# EAGLE board untitled (EAGLE 9.6.2)
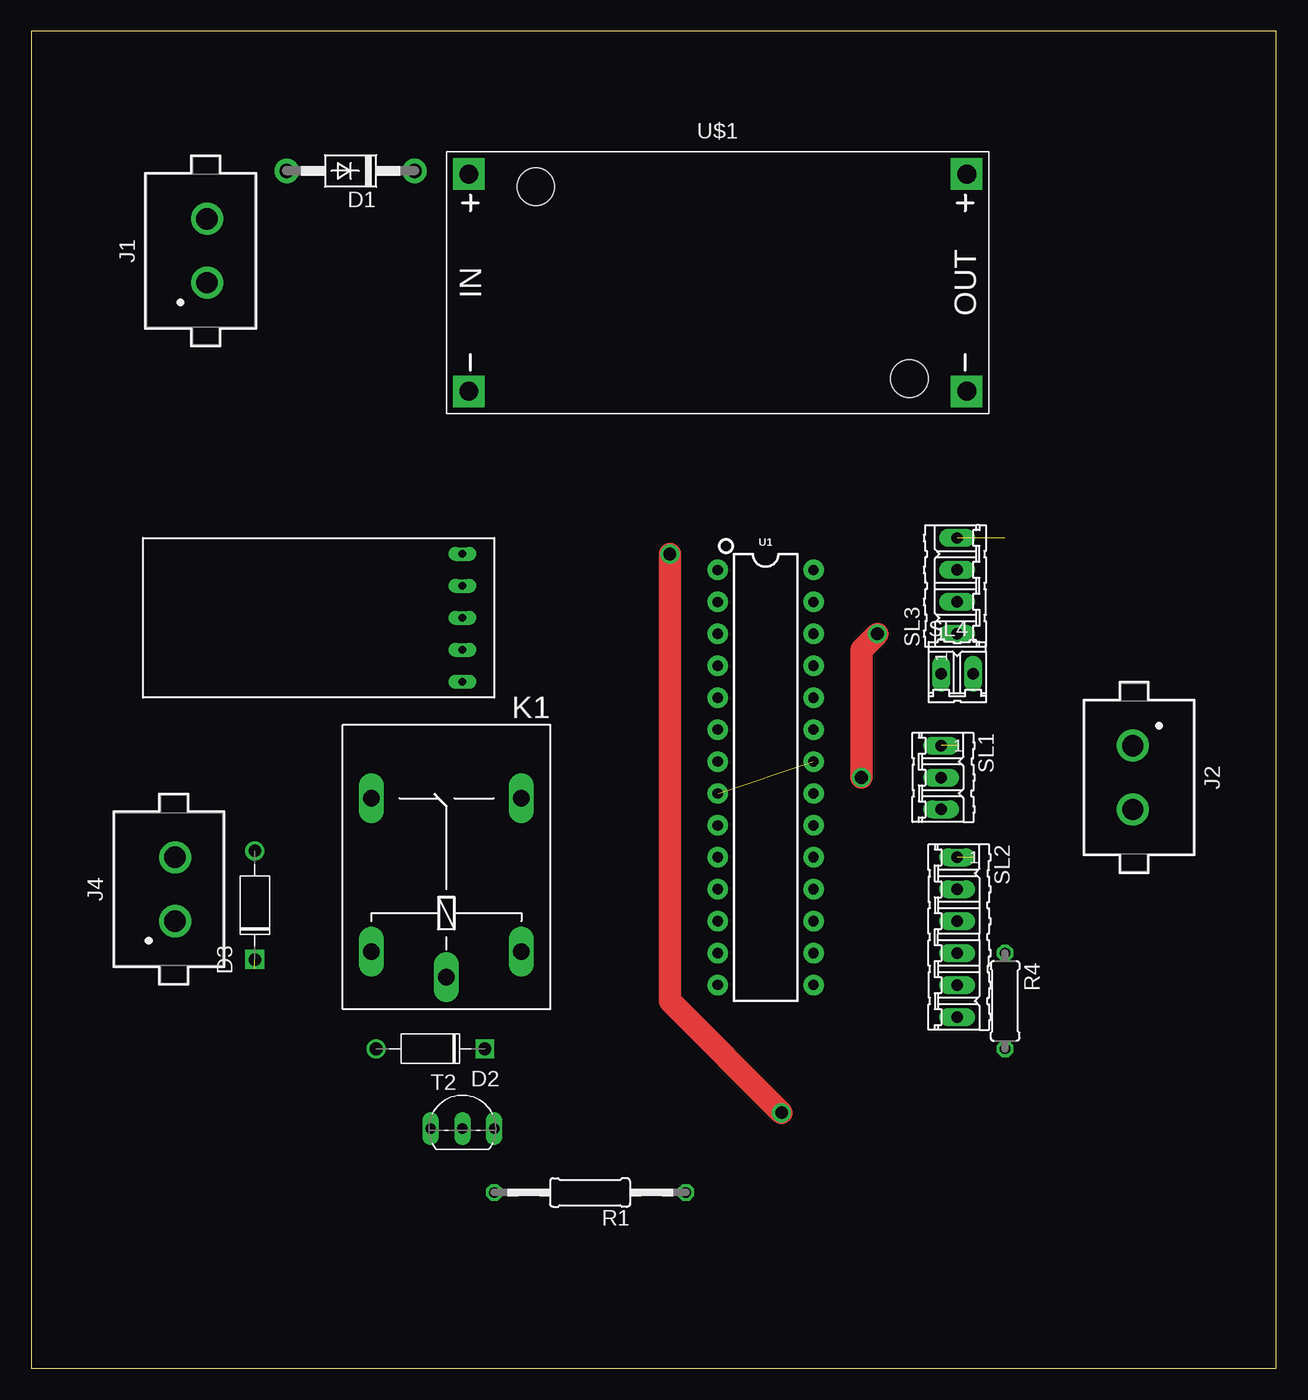
[diagram p0: board, top side]
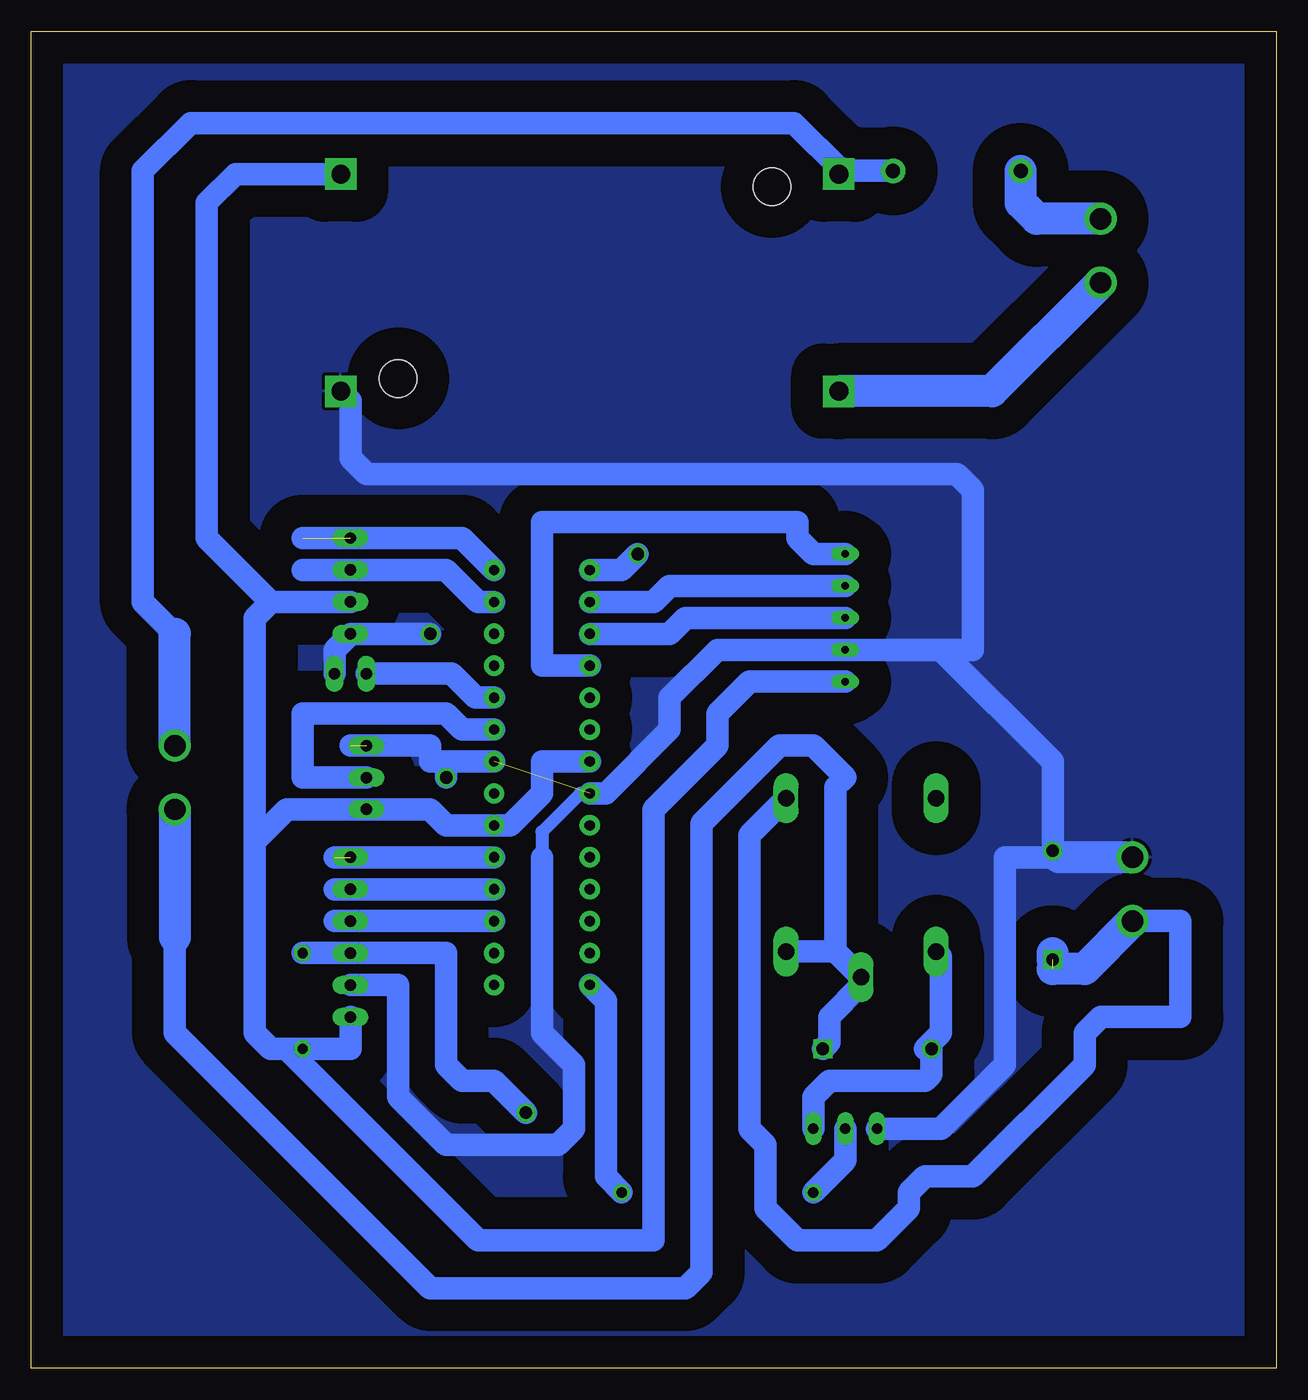
[diagram p1: board, bottom side, seen from below]

Size 99.04 x 106.35 mm. Coordinates in mm from the lower left corner, seen from the top.
Outline: 0,0 99.04,0 99.04,106.35 0,106.35 0,0
Copper layers (1*16): Top 0.035mm / dielectric 1.5mm / Bottom 0.035mm
Design rules "default *": minimum track width 6mil, minimum drill 0.35mm, track to track 30mil, track to pad 30mil, pad to pad 30mil, via to via 30mil, smd to smd 6mil, copper to edge 40mil, drill to drill 6mil, minimum pad ring 10mil, minimum via ring 8mil, stop-mask expansion 4mil, vias tented up to drill 0mil, thermal gap 10mil

## Footprints (pad centres in the part's own frame; a part is rotated, then mirrored left to right if it is on the bottom)
DO41-10 = drill 1.118 pad 1.93: A 5.08,0; C -5.08,0
DO-41 = drill 1: A 4.325,0 | drill 1 square: C -4.325,0
691305530002 = drill 1.7: 1 -2.54,0; 2 2.54,0
G5LE = drill 1.321 long: 1 -7.493,-5.969; 2 -7.493,5.969; O 4.699,5.969; P -9.525,0; S 4.699,-5.969
0207/15 = drill 0.813 octagon: 1 -7.62,0; 2 7.62,0
0207/7 = drill 0.813 octagon: 1 -3.81,0; 2 3.81,0
03P = drill 0.914 long: 1 -2.54,0; 2 0,0; 3 2.54,0
06P = drill 0.914 long: 1 -6.35,0; 2 -3.81,0; 3 -1.27,0; 4 1.27,0; 5 3.81,0; 6 6.35,0
04P = drill 0.914 long: 1 -3.81,0; 2 -1.27,0; 3 1.27,0; 4 3.81,0
02P = drill 0.914 long: 1 -1.27,0; 2 1.27,0
TO92-EBC-OVAL = drill 0.813 long: B 0,-1.27; C 2.54,-1.27; E -2.54,-1.27
DIP28 = drill 0.813 pad 1.626: 1 -16.51,-3.81; 2 -13.97,-3.81; 3 -11.43,-3.81; 4 -8.89,-3.81; 5 -6.35,-3.81; 6 -3.81,-3.81; 7 -1.27,-3.81; 8 1.27,-3.81; 9 3.81,-3.81; 10 6.35,-3.81; 11 8.89,-3.81; 12 11.43,-3.81; 13 13.97,-3.81; 14 16.51,-3.81; 15 16.51,3.81; 16 13.97,3.81; 17 11.43,3.81; 18 8.89,3.81; 19 6.35,3.81; 20 3.81,3.81; 21 1.27,3.81; 22 -1.27,3.81; 23 -3.81,3.81; 24 -6.35,3.81; 25 -8.89,3.81; 26 -11.43,3.81; 27 -13.97,3.81; 28 -16.51,3.81
DC-DC-STEP-DOWN-LM2596 = drill 1.5 pad 2.5 square: IN+ -19.812,8.636; IN- -19.812,-8.636; OUT+ 19.812,8.636; OUT- 19.812,-8.636 | hole 3: -14.478,7.62; 15.24,-7.62
HC12 = drill 0.6 long: P$1 5.08,5.08; P$2 5.08,2.54; P$3 5.08,0; P$4 5.08,-2.54; P$5 5.08,-5.08

## Placement (x,y rotation side)
D1  1N4004  [DO41-10]  25.4,95.25 180 top
D2  1N4007  [DO-41]  31.75,25.4 180 top
D3  1N4007  [DO-41]  17.78,36.83 90 top
J1  691305530002  [691305530002]  13.97,88.9 90 top
J2  [691305530002]  87.63,46.99 270 top
J4  [691305530002]  11.43,38.1 90 top
K1  G5L  [G5LE]  33.02,40.64 90 top
R1  [0207/15]  44.45,13.97 180 top
R4  [0207/7]  77.47,29.21 270 top
SL1  [03P]  72.39,46.99 270 top
SL2  [06P]  73.66,34.29 270 top
SL3  [04P]  73.66,62.23 90 top
SL4  [02P]  73.66,55.25 0 top
T2  2N2222  [TO92-EBC-OVAL]  34.29,20.32 0 top
U1  328P  [DIP28]  58.42,46.99 270 top
U$1  DC-DC-STEP-DOWN-LM2596  [DC-DC-STEP-DOWN-LM2596]  54.61,86.36 0 top
U$3  HC12  [HC12]  29.21,59.69 0 top

## Library data of the parts
D1 R1 R4 T2 = adafruit
D2 D3 = Diodes; CREATED_BY: PCBLayout.com; DIGIKEY_PART_NUMBER: 1N4007MSCT-ND; MANUFACTURER: Micro Commercial Co; MPN: 1N4007; PACKAGE: DO-41
J1 J2 J4 = Wurth_Connectors_WR-TBL Pluggable Connector; DATASHEET-URL: https://www.we-online.com/catalog/datasheet/691305530002.pdf; IR-UL: 16A; MOUNT: THT; PART-NUMBER: 691305530002; PINS: 2; PITCH: 5.08mm; TYPE: Vertical; WORKING-VOLTAGE-UL: 300V (AC)
K1 = relay; OC_FARNELL: unknown; OC_NEWARK: unknown
SL1-SL4 = con-amp-quick; OC_FARNELL: unknown; OC_NEWARK: unknown
U1 = SparkFun-IC-Microcontroller; PROD_ID: IC-09136
U$1 = diy-modules
U$3 = techart

## Nets
GND: D3.A J4.2 SL1.1 SL2.5 SL3.1 SL4.2 T2.E U1.8 U1.22 U$1.OUT- U$3.P$4
N$1: D1.A J1.2
N$2: J1.1 U$1.IN-
N$3: U1.2 U$3.P$2
N$4: SL2.1 U1.19
N$5: SL2.2 U1.18
N$6: SL2.3 U1.17
N$7: U1.3 U$3.P$3
N$8: U1.4 U$3.P$1
N$9: R1.2 T2.B
N$10: D2.A K1.2 T2.C
N$11: D3.C J4.1 K1.S
N$12: D2.C J2.2 K1.1 K1.P
N$13: SL1.2 U1.23
N$14: R4.1 SL2.4 U1.1
N$15: SL4.1 U1.24
RL: R1.1 U1.14
SCL: SL3.4 U1.28
SDA: SL3.3 U1.27
VCC: R4.2 SL1.3 SL2.6 SL3.2 U1.7 U1.20 U$1.OUT+ U$3.P$5
VIN: D1.C J2.1 U$1.IN+

## Tracks (layer width: path | path; a pad name or v marks a point on that pad's centre or on a via)
GND  (via drill 1)  (2 unrouted)
  Top 1.778: v67.31,58.42 66.04,57.15 v66.04,46.99
  Bottom 1.016: U1.8 55.37,45.72 58.42,42.67 58.42,40.64
  Bottom 1.778: T2.E 26.67,19.05 21.59,24.13 21.59,40.64 17.27,40.64 D3.A 17.78,48.26 26.67,57.15 | U1.22 66.04,48.26 | 66.04,48.26 67.31,48.26 67.31,49.53 73.66,49.53 | 26.67,57.15 24.13,57.15 24.13,69.85 25.4,71.12 72.39,71.12 73.66,72.39 73.66,76.96 U$1.OUT- | 26.67,57.15 U$3.P$4 44.45,57.15 48.26,53.34 48.26,50.8 53.34,45.72 U1.8 | v67.31,58.42 SL3.1 74.93,57.15 SL4.2 | v66.04,46.99 66.04,48.26 | SL2.5 69.85,30.48 69.85,21.59 66.04,17.78 57.15,17.78 55.88,19.05 55.88,24.13 58.42,26.67 58.42,40.64
  Bottom 2.54: J4.2 17.27,40.64
  pour Bottom (isolate 2.54): 0,0 99.06,0 99.06,106.05 0,106.05
N$1
  Bottom 2.54: J1.2 19.05,91.44 20.32,92.71 D1.A
N$2
  Bottom 2.54: U$1.IN- 22.61,77.72 J1.1
N$3
  Bottom 1.778: U$3.P$2 48.26,62.23 49.53,60.96 U1.2
N$4  (1 unrouted)
  Bottom 1.778: U1.19 71.12,40.64 72.39,40.64 74.93,40.64
N$5
  Bottom 1.778: 74.93,38.1 SL2.2 U1.18
N$6
  Bottom 1.778: 74.93,35.56 SL2.3 U1.17
N$7
  Bottom 1.778: U1.3 48.26,58.42 46.99,59.69 U$3.P$3
N$8
  Bottom 1.778: U$3.P$1 36.83,64.77 38.1,66.04 38.1,67.31 58.42,67.31 58.42,55.88 U1.4
N$9
  Bottom 1.778: T2.B 34.29,16.51 R1.2
N$10
  Bottom 1.778: K1.2 26.67,32.77 26.67,26.67 27.94,25.4 D2.A 27.43,23.38 27.94,22.86 35.56,22.86 36.83,21.59 T2.C
N$11  (1 unrouted)
  Bottom 1.778: J4.1 7.62,35.56 7.62,27.94 13.97,27.94 15.24,26.67 15.24,24.13 24.13,15.24 27.94,15.24 29.21,13.97 29.21,12.7 31.75,10.16 38.1,10.16 40.64,12.7 40.64,17.78 41.91,19.05 41.91,42.42 K1.S
  Bottom 2.54: 17.78,31.75 15.24,31.75 J4.1 | D3.C 17.78,33.02
N$12
  Bottom 1.778: D2.C 35.56,25.91 35.56,27.94 33.02,30.48 K1.P | 33.02,31.75 K1.P | K1.P 35.05,33.15 | 35.05,33.15 K1.1 | 35.05,33.15 35.05,46.23 34.29,46.99 36.83,49.53 39.52,49.53 45.72,43.33 45.72,7.62 46.99,6.35 67.31,6.35 87.63,26.67 87.63,34.29
  Bottom 2.54: J2.2 87.63,34.29
N$13
  Bottom 1.778: U1.23 64.77,50.8 66.04,52.07 77.47,52.07 77.47,46.99 SL1.2
N$14  (via drill 1)
  Top 1.778: v50.8,64.77 50.8,29.21 v59.69,20.32
  Bottom 1.778: SL2.4 72.39,33.02 | SL2.4 R4.1 | U1.1 52.07,63.5 v50.8,64.77 | v59.69,20.32 62.23,22.86 64.77,22.86 66.04,24.13 66.04,33.02 SL2.4
N$15
  Bottom 1.778: U1.24 63.72,53.34 65.62,55.25 SL4.1
RL
  Bottom 1.778: R1.1 53.34,15.24 53.34,29.21 U1.14
SCL  (1 unrouted)
  Bottom 1.778: U1.28 64.77,66.04 77.47,66.04
SDA
  Bottom 1.778: U1.27 63.5,60.96 66.04,63.5 SL3.3 77.47,63.5
VCC
  Bottom 1.778: SL2.6 73.66,25.4 R4.2 | R4.2 78.74,25.4 63.5,10.16 49.53,10.16 49.53,44.45 44.45,49.53 44.45,52.07 41.91,54.61 U$3.P$5 | 81.28,41.91 81.28,26.67 80.01,25.4 R4.2 | SL3.2 80.01,60.96 | 80.01,60.96 81.28,59.69 81.28,41.91 | 81.28,41.91 78.74,44.45 SL1.3 67.31,44.45 66.04,43.18 U1.20 60.96,43.18 58.42,45.72 58.42,48.26 U1.7 | U$1.OUT+ 82.8,95 85.09,92.71 85.09,66.04 80.01,60.96
VIN
  Bottom 1.778: D1.C 34.54,95.25 | 34.54,95.25 U$1.IN+ | 34.54,95.25 38.35,99.06 86.36,99.06 90.17,95.25 90.17,60.96 87.63,58.42
  Bottom 2.54: J2.1 87.63,58.42